# Altium PCB PCB3.PcbDoc
Units mm, origin at the board's own origin, x right, y up, seen from the top; angles counter-clockwise.
Board outline 140 x 65 mm, 2 copper layers (Top Layer, Bottom Layer), stack 1.971 mm thick; 22 components, 15 nets, 76 pads, 2 vias.
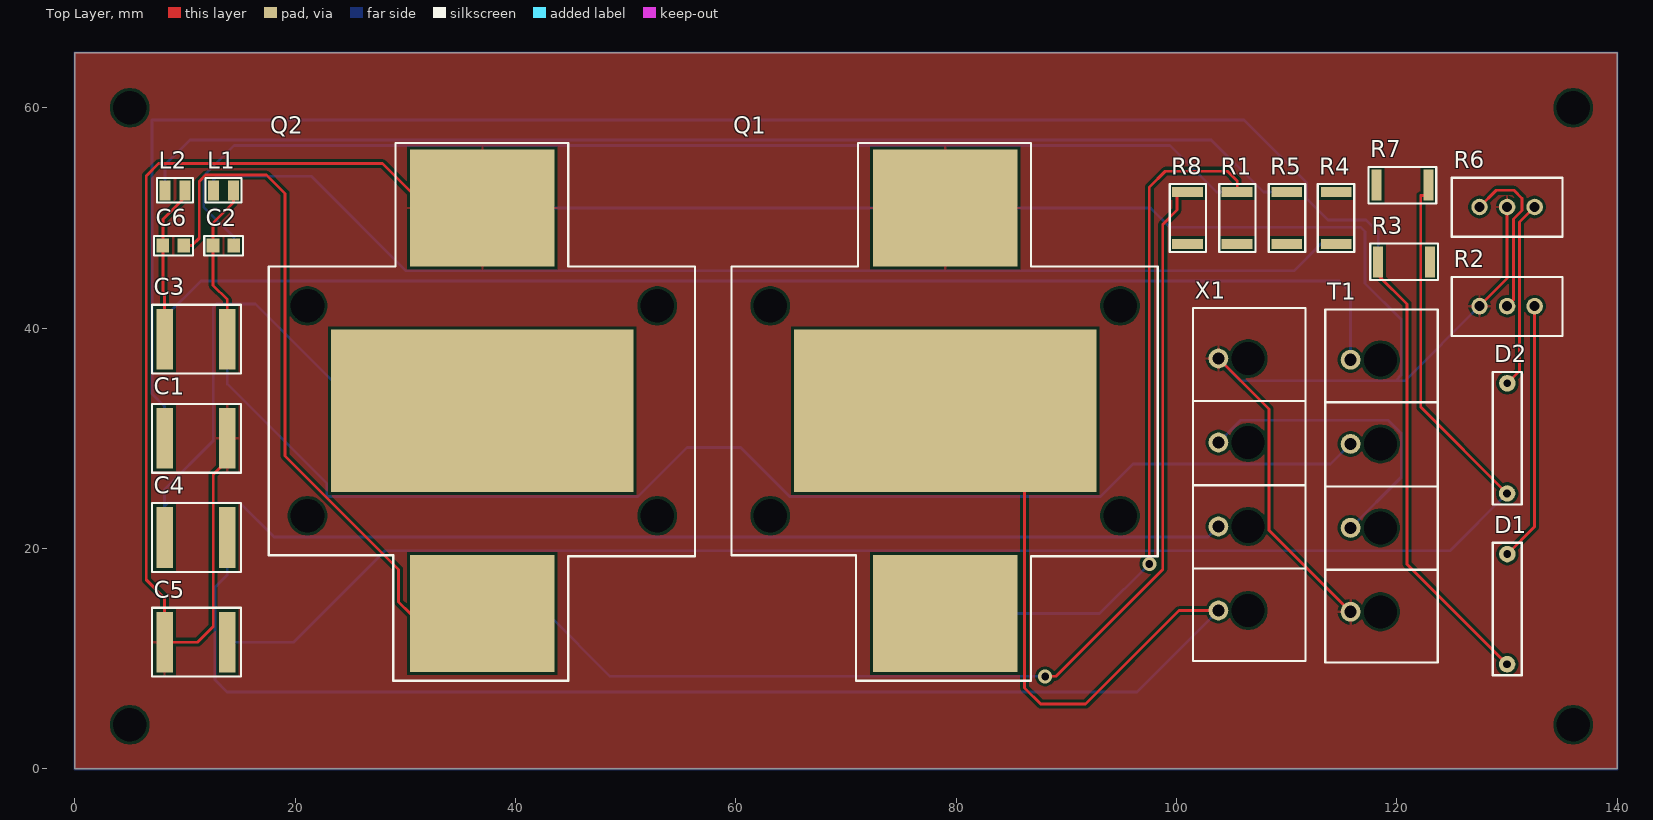
[diagram p0: Top Layer view]
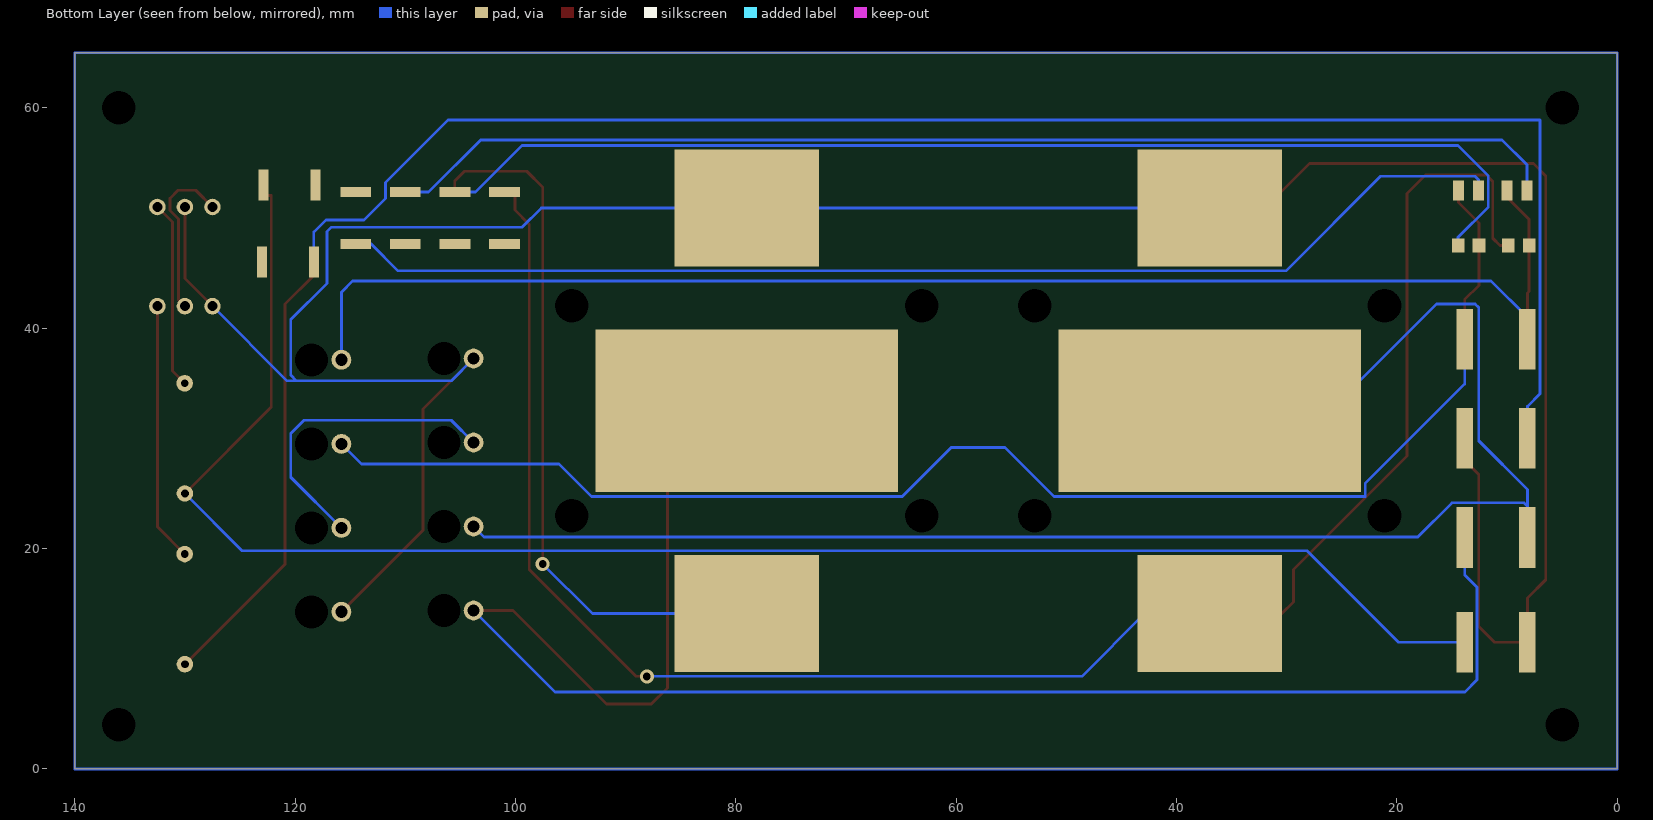
[diagram p1: Bottom Layer view, seen from below]
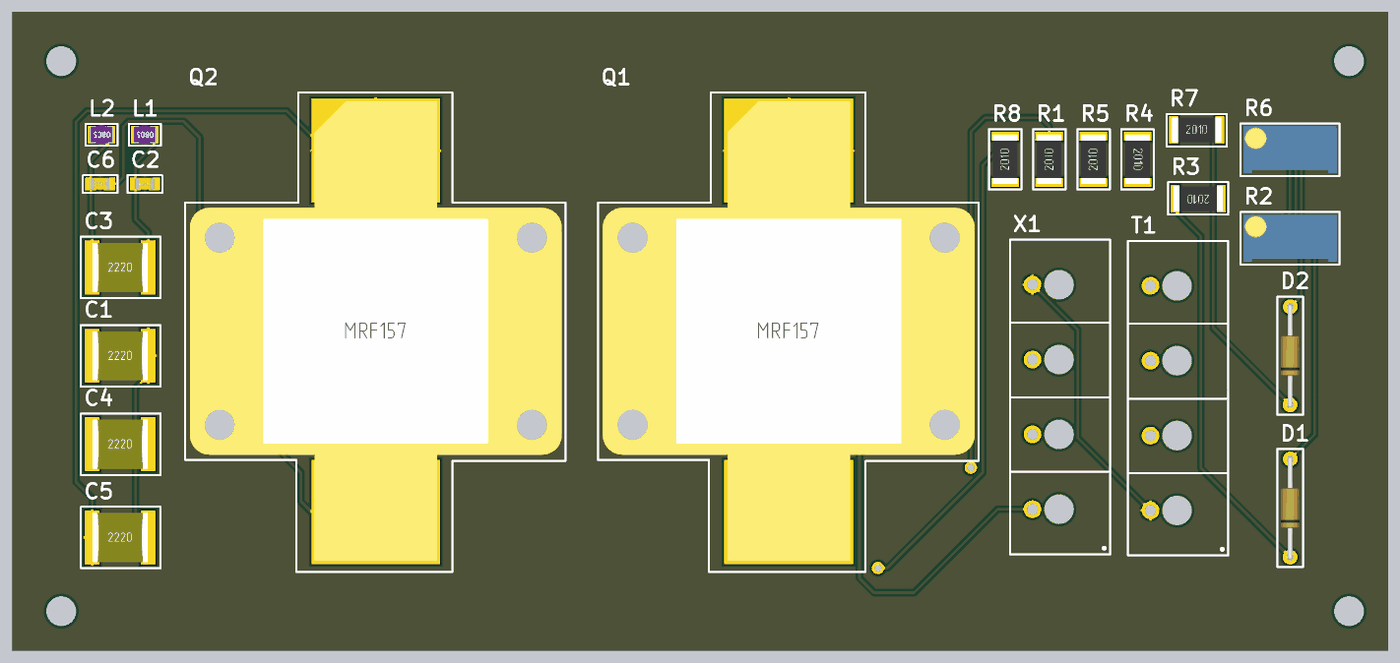
[diagram p2: 3D render of the assembled board from above, using the file's embedded part models]

## Layer stack, top to bottom
Top Solder: solder mask 0.0102, Solder Resist, Dk 3.5
Top Layer: signal copper 0.0356
Dielectric 1: dielectric 1.9, FR-4, Dk 4.8
Bottom Layer: signal copper 0.0356
Bottom Solder: solder mask 0.0102, Solder Resist, Dk 3.5

## Board outline
0,0 0,65 140,65 140,0

## Design rules (kind name [scope] priority, off if disabled: settings)
Clearance [All] p1: gap=0.254 ignorepadtopadclearanceinfootprint=FALSE except(0: Arc-Hole Track-Hole SMDPad-Hole THPad-Hole Via-Hole Fill-Hole Poly-Hole Region-Hole Text-Hole)
PolygonConnect [All] p1: connectstyle=Relief reliefconductorwidth=0.254 reliefentries=4 polygonreliefangle="90 Angle" airgapwidth=0.254
RoutingVias [All] p1: holewidth=0.711 width=1.27 viastyle="Through Hole" minholewidth=0.711 minwidth=1.27 maxholewidth=0.711 maxwidth=1.27
SolderMaskExpansion [All] p1: expansion=0.102 istentingtop=FALSE
Width [All] p1: maxlimit=0.254 minlimit=0.254 preferedwidth=0.254
30 further rules are at their usual default settings.

## Components (designator, comment, footprint, x,y, rotation, side; value= is the part's Value field where it differs from the comment)
C1 "0.1 мкФ-10%2220" CAP_2220 11,30 r0 top
C2 "2.2пФ±0.25пФ 0805" CAP_0805 13.5,47.5 r0 top
C3 "820 пФ-5%2220" CAP_2220 11,39 r0 top
C4 "0.01 мкФ-10%2220" CAP_2220 11,21 r0 top
C5 "0.1 мкФ-10%2220" CAP_2220 11,11.5 r0 top
C6 "2.2пФ±0.25пФ 0805" CAP_0805 8.95,47.5 r0 top
D1 "1N4148" DIODE 130,14.5 r270 top
D2 "1N4148" DIODE 130,30 r270 top
L1 "15 нГн 5% 0805" INDUCTOR_0805 13.5,52.5 r180 top
L2 "15 мкГн 5% 0805" INDUCTOR_0805 9.1,52.5 r180 top
Q1 "MRF157" MOSFET 79,32.5 r0 top
Q2 "MRF157" MOSFET 37,32.5 r0 top
R1 "12 кОм 5% 2010" Resistor_2010 105.5,50 r90 top
R2 "1 кОм 10% 3296" TRIMPOT 130,42 r180 top
R3 "100 Ом-5% 2010" Resistor_2010 120.65,46 r180 top
R4 "24 Ом 5% 2010" Resistor_2010 114.5,50 r270 top
R5 "24 Ом 5% 2010" Resistor_2010 110,50 r90 top
R6 "1 кОм 10% 3296" TRIMPOT 130,51 r180 top
R7 "100 Ом 5% 2010" Resistor_2010 120.5,53 r0 top
R8 "12 кОм 5%2010" Resistor_2010 101,50 r90 top
T1 "ET559885" "CON: WJ06-04P" 118.5,29.5 r90 top
X1 "15EDGB-3.81-04P-14-00A(H)" "CON: WJ06-04P" 106.5,29.62 r90 top

## Footprints (in the part's own frame and the unit in brackets; to place one, negate y for a bottom-side part, rotate by r counter-clockwise, add the part's x,y. Pads: shape width x height; smd on the part's side, far side on the other; paste and mask are expansions set on the pad)
CAP_0805 [mm]
  rect 1.14x1.3 all layers, no hole: 0(-0.95,0) 1(0.95,0)
  silkscreen extent -1.75,-0.9 1.78,0.87, body extent -1,-0.63 1,0.63, height 0.61
CAP_2220 [mm]
  rect 1.5x5.5 all layers, no hole: 0(-2.85,0) 1(2.85,0)
  silkscreen extent -4,-3.13 4.1,3.13, body extent -2.8,-2.5 2.8,2.5, height 1.8
"CON: WJ06-04P" [mm]
  round 1.8 hole 1.1: 1(-15.24,2.7) 2(-7.62,2.7) 3(0,2.7) 4(7.63,2.7)
  round 0.5 on Mech1: ""(-19.2,-4.6)
  round 0.5 on Top Overlay: ""(-19.2,-4.6)
  round 2.4 hole 3: ""(-15.24,0) ""(-7.62,0) ""(0,0) ""(7.62,0)
  silkscreen extent -19.83,-5.2 12.2,5, body extent -19.74,-5.08 12.12,4.92, height 5.95
DIODE [mm]
  round 1.5 hole 0.7: 0(-5,0.025) 1(5,0)
  silkscreen extent -6.02,-1.3 6,1.33, body extent -5.25,-0.95 5.25,0.95, height 2.94
INDUCTOR_0805 [mm]
  rect 1x1.8 all layers, no hole: 0(-0.9,0) 1(0.9,0)
  silkscreen extent -1.62,-1.13 1.63,1.1, body extent -1.15,-0.89 1.15,0.89, height 1.43
MOSFET [mm]
  round 0 hole 3.05: 0(-15.875,-9.525) 0(-15.875,9.525) 0(15.875,-9.525) 0(15.875,9.525)
  rect 13.1x10.6 all layers, no hole: 1(0,18.4) 2(0,-18.4)
  rect 27.45x14.75 all layers, no hole: 3(0,0)
  silkscreen extent -19.4,-24.5 19.3,24.3, body extent -18.92,-23.38 18.93,23.38, height 8.38
Resistor_2010 [mm]
  rect 0.9x2.8 all layers, no hole: 0(-2.35,0) 1(2.35,0)
  silkscreen extent -3.07,-1.68 3.08,1.63, body extent -2.5,-1.25 2.5,1.25, height 0.55
TRIMPOT [mm]
  round 1.5 hole 0.9: 1(2.5,0) 2(0,0) 3(-2.5,0)
  silkscreen extent -5.03,-2.65 5.02,2.7, body extent -4.76,-2.41 4.76,2.41, height 14.95

## Part data
C1 C4: library part cond_2220C, Manufacturer="Kemet Electronics", PartNumber=C2220C103KGRACAUTO, Href=https://www.chipdip.ru/product0/8005312595, Kind=Capacitor
C2 C6: library part cond_2220C, Manufacturer="Murata Electronics", PartNumber=GRM2165C1H2R2CD01D, Href=https://www.chipdip.ru/product/grm2165c1h2r2c, Kind=Capacitor
C3: library part cond_2220C, Manufacturer="Cornell Dubilier", PartNumber=MC22FF821J-F, Href=https://www.chipdip.ru/product0/8004609482, Kind=Capacitor
C5: library part cond_2220C, Manufacturer=PDC, PartNumber=MA2220XR104K500ERG, Href=https://www.chipdip.ru/product0/8001594404, Kind=Capacitor
L1: library part inductor, Manufactured="Murata Electronics", PartNumber=LQW2BAS15NJ00L, Href=https://www.chipdip.ru/product0/8005346407, Kind=Inductors
L2: library part inductor, Manufactured=Abracon, PartNumber=AIML-0805-150K-T, Href=https://www.chipdip.ru/product0/8006375326, Kind=Inductors
Q1 Q2: library part MTF157, Kind=Transistor, PartNumber=MRF157
R1: library part Resistor_2010R, Manufacturer=Yageo, PartNumber=RC2010JK-0712KL, Href=https://www.chipdip.ru/product0/8147844003, Kind=Resistor
R2 R6: library part Trimpot, Manufacturer=Bourns, PartNumber=3296X-1-102LF, Href=https://www.chipdip.ru/product0/8038726753, Kind=Trimpot
R3 R7: library part Resistor_2010R, Manufacturer=VIKING, PartNumber=CR-0AJL4--100R, Href=https://www.chipdip.ru/product0/8004209699, Kind=Resistor
R4 R5: library part Resistor_2010R, Manufacturer=VIKING, PartNumber=CR-0AJL4---24R, Href=https://www.chipdip.ru/product0/8014261265, Kind=Resistor
R8: library part Resistor_2010R, Manufacturer=Hottech, PartNumber=RI2010L123JT, Href=https://www.chipdip.ru/product0/8017128381, Kind=Resistor
T1: library part Transformer, Manufacturer="ПО Электротехник", Href=https://www.chipdip.ru/product/et559885, Kind=Transformer, PartNumber=ET559885
X1: library part 4-Connector, Manufacturer="Degson Electronics", Href=https://www.chipdip.ru/product/15edgb-3.81-04p-14-00a-h, Kind=Connector, PartNumber=15EDGB-3.81-04P-14-00A(H)
D1 D2: Kind=Diode, PartNumber=1N4148

## Free pads (board coordinates)
  round 0 hole 3.05 unplated: 00(5,4) 00(5,60) 00(136,4) 00(136,60)

## Via types
v1: diameter 1.27, hole 0.711, Top Layer to Bottom Layer, 2 vias

## Nets (pads, with @x,y where several pads share a name; then routed paths per layer and width w, separated by ;. In a path a pad name is that pad's centre, name@x,y a point inside that pad or via, vN(x,y) a via of type N, cw(c..) or ccw(c..) an arc to the next point about the centre after c; other vN are vias at no path point)
GND: C1.1 C5.0 Q1.1 Q2.1 R2.1 R6.2 T1.1 X1.4 | length 259.7
  Top Layer w0.254: C1.1 13.85,28.01 12.566,26.726 12.566,12.922 11.144,11.5 C5.0 8.15,15.51 6.496,17.164 6.496,53.816 7.613,54.934 27.938,54.934 31.972,50.9 Q2.1 ; X1.4 108.401,32.649 108.401,21.659 T1.1 ; R2.1 130,44.5 R6.2
  Bottom Layer w0.254: Q2.1 Q1.1 97.651,50.9 99.384,49.168 116.706,49.168 117.113,48.761 117.113,44.062 120.389,40.786 120.389,35.757 119.856,35.223 ; X1.4 105.827,35.223 119.856,35.223 ; R2.1 120.723,35.223 119.856,35.223
NetC1_0: C1.0 D1.1 R3.1 | length 189.8
  Top Layer w0.254: R3.1 118.3,44.806 120.923,42.183 120.923,18.577 D1.1
  Bottom Layer w0.254: C1.0 8.15,32.909 7.004,34.055 7.004,58.871 7.029,58.896 106.115,58.896 111.804,53.206 111.804,51.784 113.76,49.828 117.208,49.828 118.3,48.736 R3.1
NetC2_0: C2.0 C3.1 L1.0 T1.3 | length 131.4
  Top Layer w0.254: C3.1 13.85,42.589 12.55,43.889 C2.0 12.55,49.558 14.4,51.408 L1.0
  Bottom Layer w0.254: C3.1 13.85,34.944 22.879,25.915 22.879,24.733 51.124,24.733 55.569,29.178 60.445,29.178 64.89,24.733 93.11,24.733 96.056,27.679 113.979,27.679 T1.3
NetC2_1: C2.1 Q1.2 R1.1 | length 168.7
  Top Layer w0.254: v1(97.529,18.612) 97.529,52.8 98.977,54.248 104.616,54.248 105.505,53.359 105.505,52.35 R1.1
  Bottom Layer w0.254: C2.1 14.45,48.249 11.703,50.997 11.703,53.816 14.468,56.581 99.402,56.581 103.633,52.35 R1.1 ; Q1.2 93.018,14.1 v1(97.529,18.612)
NetC3_0: C3.0 C6.0 L2.0 T1.4 | length 132
  Top Layer w0.254: C3.0 8.15,43.173 8,43.323 C6.0 8,49.885 10,51.885 L2.0
  Bottom Layer w0.254: C3.0 8.15,40.989 11.452,44.291 114.776,44.291 115.8,43.267 T1.4
NetC4_0: C4.0 Q2.3 X1.2 | length 148.8
  Bottom Layer w0.254: C4.0 8.15,23.844 ; Q2.3 26.11,32.5 16.402,42.208 12.897,42.208 12.566,41.878 12.566,29.784 8.15,25.368 8.15,23.844 ; X1.2 102.85,21.05 18.104,21.05 15.005,24.149 8.455,24.149 8.15,23.844
NetC4_1: C4.1 Q1.3 X1.1 | length 162.1
  Top Layer w0.254: Q1.3 86.201,32.5 86.201,7.359 87.674,5.886 91.738,5.886 100.232,14.38 X1.1
  Bottom Layer w0.254: C4.1 13.85,17.621 12.719,16.49 12.719,8.096 13.836,6.978 96.398,6.978 X1.1
NetC5_1: C5.1 D2.1 R7.1 | length 153.7
  Top Layer w0.254: R7.1 122.85,52.038 122.167,52.038 122.167,32.833 D2.1
  Bottom Layer w0.254: C5.1 19.856,11.5 28.162,19.805 124.805,19.805 D2.1
NetC6_1: C6.1 Q2.2 R8.1 | length 168.8
  Top Layer w0.254: C6.1 10.636,47.5 11.296,48.16 11.296,53.308 11.881,53.892 17.418,53.892 19.094,52.216 19.094,28.391 29.397,18.088 29.397,15.151 30.448,14.1 Q2.2 ; v1(88.081,8.401) 89.038,8.401 98.749,18.111 98.749,49.422 100.044,50.717 100.044,52.35 R8.1
  Bottom Layer w0.254: Q2.2 42.894,14.1 48.593,8.401 v1(88.081,8.401)
NetD1_0: D1.0 R2.3 | length 23.5
  Top Layer w0.254: D1.0 132.5,21.975 R2.3
NetD2_0: D2.0 R6.3 | length 17
  Top Layer w0.254: D2.0 131.131,36.106 131.131,49.631 R6.3
NetL1_1: L1.1 R4.1 | length 107.6
  Bottom Layer w0.254: L1.1 12.6,53.469 12.922,53.791 21.482,53.791 30.067,45.205 110.649,45.205 113.093,47.65 R4.1
NetL2_1: L2.1 R5.1 | length 107
  Bottom Layer w0.254: L2.1 8.2,54.832 10.457,57.089 103.154,57.089 107.893,52.35 R5.1
NetR2_2: R2.2 R6.1 | length 15.1
  Top Layer w0.254: R6.1 129.021,52.521 130.626,52.521 131.362,51.784 131.362,50.692 130.575,49.904 130.575,42.575 R2.2
NetT1_2: T1.2 X1.3 | length 28.4
  Bottom Layer w0.254: X1.3 105.822,31.642 119.196,31.642 120.389,30.448 120.389,26.469 T1.2
pads on no net: Q1.0 Q2.0 R1.0 R3.0 R4.0 R5.0 R7.0 R8.0 T1. X1.
copper on no net: | length 410
  Bottom Layer w0.254: 0,0 140,0 140,65 0,65 0,0

## Polygon pours and split planes (outlines as drawn)
GND on Top Layer "GND_L01_P002" (solid, remove dead copper, pour order 2): 0,65 0,0 140,0 140,65
no net on Top Layer "NONET_L01_P001" (solid, remove dead copper, pour order 1): 0,0 0,65 140,65 140,0

## Silkscreen, mask and mechanical layers (free items; w line width, h text height)
Border:
  lines w0.2: 0,50 0,0 100,0